# EAGLE board teensy_pedal (EAGLE 7.3.0)
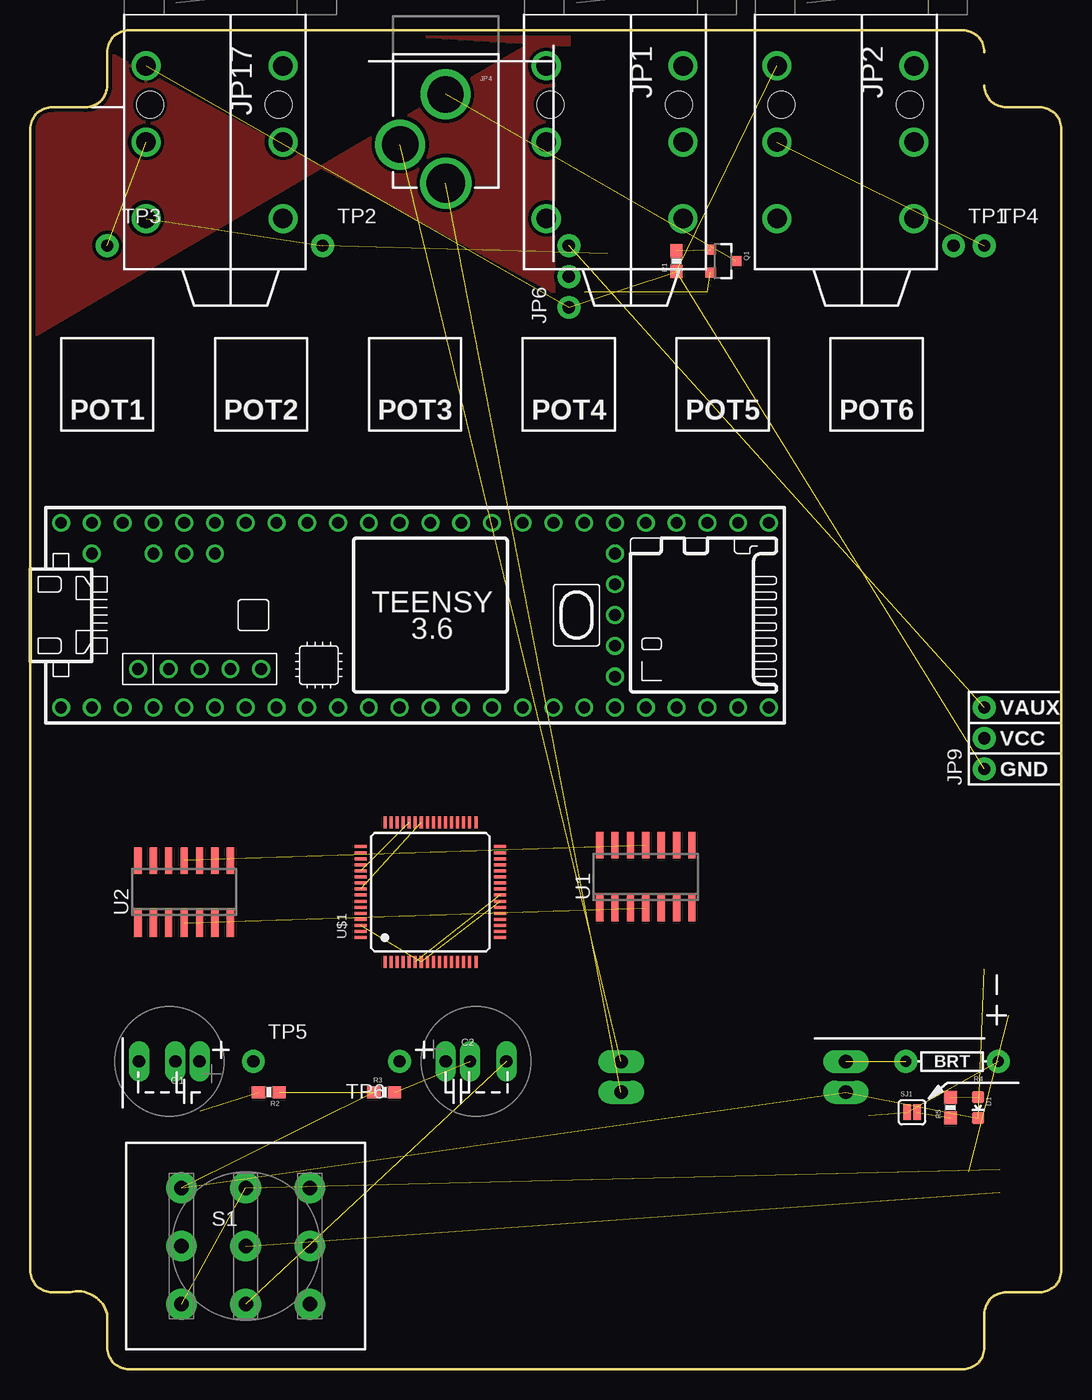
[diagram p0: board, top side]
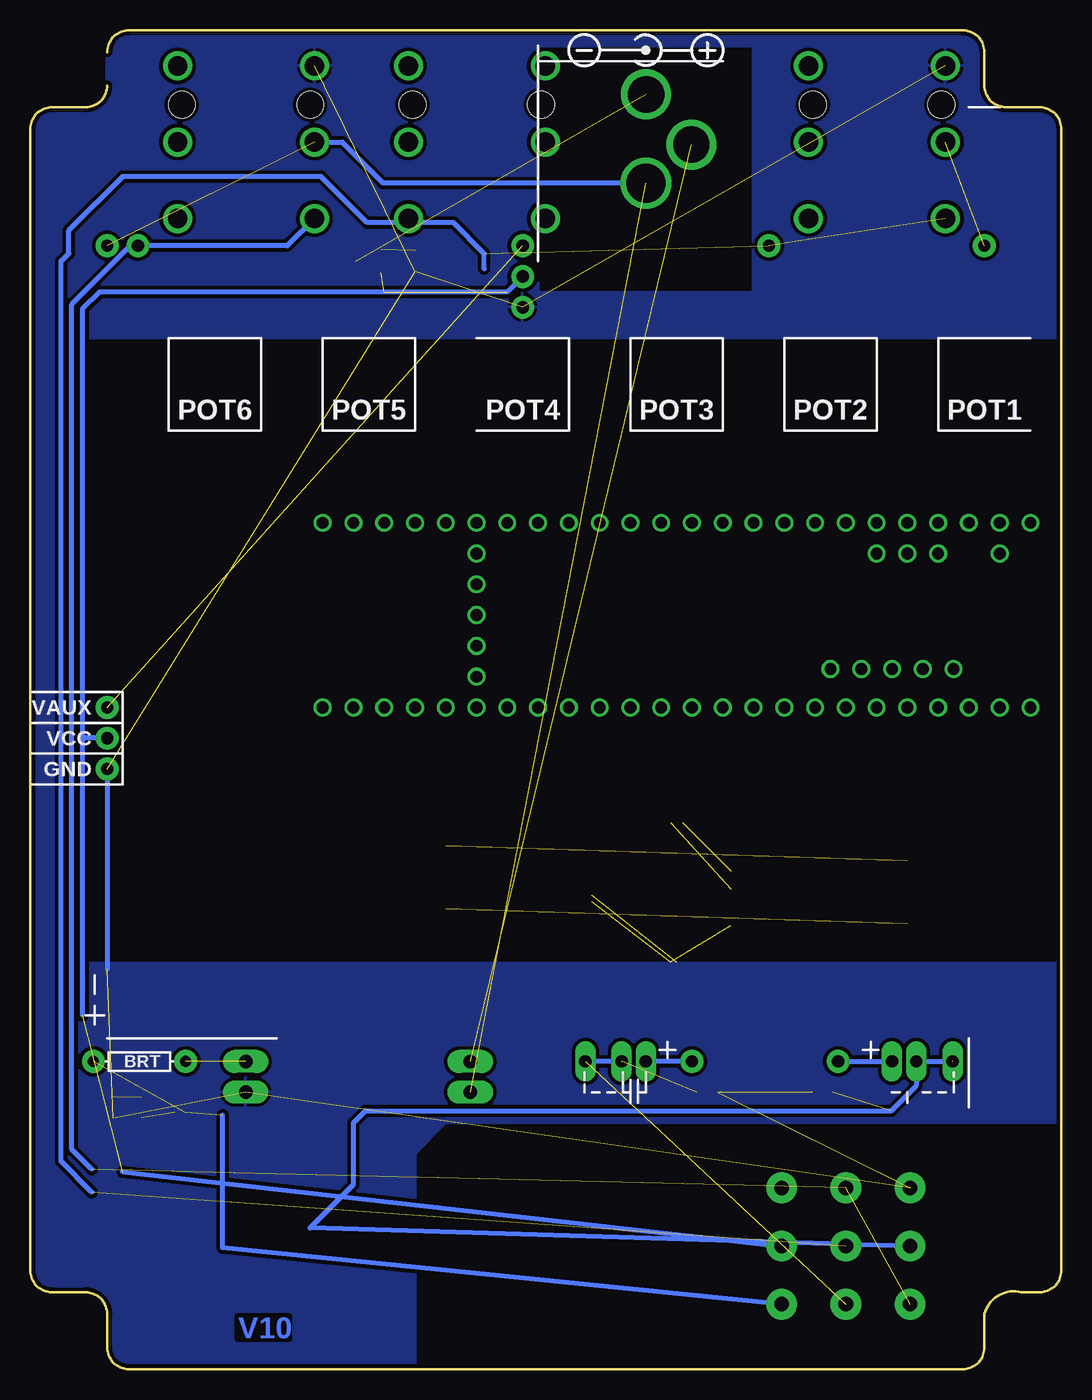
[diagram p1: board, bottom side, seen from below]

Size 85.09 x 110.49 mm. Coordinates in mm from the lower left corner, seen from the top.
Outline: 78.74,108.69 arc90 76.94,110.49 8.15,110.49 arc90 6.35,108.69 6.35,105.94 arc-90 4.55,104.14 1.8,104.14 arc90 0,102.34 0,8.15 arc90 1.8,6.35 3.28,6.35 arc-90 6.35,4.55 6.35,1.8 arc90 8.15,0 76.94,0 arc90 78.74,1.8 78.74,4.55 arc-90 80.54,6.35 83.29,6.35 arc90 85.09,8.15 85.09,102.34 arc90 83.29,104.14 80.54,104.14 arc-90 78.74,105.94
Copper layers (1*16): Top 0.035mm / dielectric 1.5mm / Bottom 0.035mm
Design rules "SparkFun-2-layer-STANDARD": minimum track width 10mil, minimum drill 20mil, track to track 10mil, track to pad 8mil, pad to pad 8mil, via to via 10mil, smd to smd 8mil, copper to edge 8mil, drill to drill 8mil, minimum pad ring 10mil, minimum via ring 10mil, stop-mask expansion 4mil, vias tented up to drill 25mil, thermal gap 10mil

## Footprints (pad centres in the part's own frame; a part is rotated, then mirrored left to right if it is on the bottom)
DUAL-CAP = drill 1.016 pad 1.676 long: P$1 0,0; P$2 2,0; P$3 5,0
LED-0603 = smd 1 x 1: A 0,-0.877; C 0,0.877
AUDIO-JACK-.25-INCH-HORIZ-PTH = drill 1.6: RING 10.5,-6.95; RING-NORM 10.5,4.35; SLEEVE 4.2,-6.95; SLEEVE-NORM 4.2,4.35; TIP 16.8,-6.95; TIP-NORM 16.8,4.35 | hole 2.2: 7.4,4; 7.4,-6.6
1X02_LONGPADS = drill 1.118 pad 1.88 long: 1 0,0; 2 2.54,0
POWER-BARRELJACK-PTH-LOCK-FIXED = drill 2.997 pad 4.115: SLEEVE 0.025,6.557; SLEEVE-NORMAL 3.762,10.7 | drill 3.2 pad 4.115: TIP 0,13.878
1X03_NO_SILK = drill 1.016 pad 1.88: 1 0,0; 2 2.54,0; 3 5.08,0
SOT23-3 = smd 0.8 x 0.9: 1 -0.95,-1; 2 0.95,-1; 3 0,1.1
0603-RES = smd 1.1 x 1: 1 -0.85,0; 2 0.85,0
AXIAL-0.3 = drill 0.9 pad 1.88: P$1 -3.81,0; P$2 3.81,0
STOMP-SWITCH-3PDT = drill 1.2 pad 2.54: P$1 -5.3,4.8; P$2 -5.3,0; P$3 -5.3,-4.8; P$4 0,4.8; P$5 0,0; P$6 0,-4.8; P$7 5.3,4.8; P$8 5.3,0; P$9 5.3,-4.8
PAD-JUMPER-2-NC_BY_PASTE_YES_SILK_FULL_BOX = smd 0.635 x 1.27: 1 -0.412,0; 2 0.412,0
1X01_NO_SILK = drill 1.016 pad 1.88: 1 0,0
SO14 = smd 0.6 x 2.2: 1 -3.81,-2.6; 2 -2.54,-2.6; 3 -1.27,-2.6; 4 0,-2.6; 5 1.27,-2.6; 6 2.54,-2.6; 7 3.81,-2.6; 8 3.81,2.6; 9 2.54,2.6; 10 1.27,2.6; 11 0,2.6; 12 -1.27,2.6; 13 -2.54,2.6; 14 -3.81,2.6
LQFP64 = smd 0.25 x 1: 1 -3.75,-5.75; 2 -3.25,-5.75; 3 -2.75,-5.75; 4 -2.25,-5.75; 5 -1.75,-5.75; 6 -1.25,-5.75; 7 -0.75,-5.75; 8 -0.25,-5.75; 9 0.25,-5.75; 10 0.75,-5.75; 11 1.25,-5.75; 12 1.75,-5.75; 13 2.25,-5.75; 14 2.75,-5.75; 15 3.25,-5.75; 16 3.75,-5.75; 33 3.75,5.75; 34 3.25,5.75; 35 2.75,5.75; 36 2.25,5.75; 37 1.75,5.75; 38 1.25,5.75; 39 0.75,5.75; 40 0.25,5.75; 41 -0.25,5.75; 42 -0.75,5.75; 43 -1.25,5.75; 44 -1.75,5.75; 45 -2.25,5.75; 46 -2.75,5.75; 47 -3.25,5.75; 48 -3.75,5.75 | smd 1 x 0.25: 17 5.75,-3.75; 18 5.75,-3.25; 19 5.75,-2.75; 20 5.75,-2.25; 21 5.75,-1.75; 22 5.75,-1.25; 23 5.75,-0.75; 24 5.75,-0.25; 25 5.75,0.25; 26 5.75,0.75; 27 5.75,1.25; 28 5.75,1.75; 29 5.75,2.25; 30 5.75,2.75; 31 5.75,3.25; 32 5.75,3.75; 49 -5.75,3.75; 50 -5.75,3.25; 51 -5.75,2.75; 52 -5.75,2.25; 53 -5.75,1.75; 54 -5.75,1.25; 55 -5.75,0.75; 56 -5.75,0.25; 57 -5.75,-0.25; 58 -5.75,-0.75; 59 -5.75,-1.25; 60 -5.75,-1.75; 61 -5.75,-2.25; 62 -5.75,-2.75; 63 -5.75,-3.25; 64 -5.75,-3.75
TEENSY_3.5/3.6 = drill 0.965: 0/RX -25.4,-7.62; 1/TX -22.86,-7.62; 2 -20.32,-7.62; 3/CANTX -17.78,-7.62; 3V3 7.62,-7.62; 3V3_2 17.78,-2.54; 3V3_LO -22.86,7.62; 4/CANRX -15.24,-7.62; 5 -12.7,-7.62; 6 -10.16,-7.62; 7 -7.62,-7.62; 8 -5.08,-7.62; 9/CS -2.54,-7.62; 10/CS 0,-7.62; 11/MOSI 2.54,-7.62; 12/MISO 5.08,-7.62; 13/SCK 5.08,7.62; 14/A0 2.54,7.62; 15/A1 0,7.62; 16/A2 -2.54,7.62; 17/A3 -5.08,7.62; 18/A4/SDA -7.62,7.62; 19/A5/SCL -10.16,7.62; 20/A6 -12.7,7.62; 21/A7 -15.24,7.62; 21/DAC0 12.7,7.62; 22/A8 -17.78,7.62; 23/A9 -20.32,7.62; 24 10.16,-7.62; 25 12.7,-7.62; 26 15.24,-7.62; 27 17.78,-7.62; 28 20.32,-7.62; 29 22.86,-7.62; 30 25.4,-7.62; 31/A12 27.94,-7.62; 32/A13 30.48,-7.62; 33/A14 30.48,7.62; 34/A15 27.94,7.62; 35/A16 25.4,7.62; 36/A17 22.86,7.62; 37/A18 20.32,7.62; 38/A19 17.78,7.62; 39/A20 15.24,7.62; A10 -17.78,5.08; A11 -15.24,5.08; A22/DAC1 10.16,7.62; AGND -25.4,7.62; AREF -20.32,5.08; GND -27.94,-7.62; GND2 7.62,7.62; GND3 17.78,0; PROG 17.78,2.54; RESET 17.78,5.08; U5V -21.59,-4.445; UD+ -16.51,-4.445; UD- -19.05,-4.445; UGND1 -13.97,-4.445; UGND2 -11.43,-4.445; VBAT 17.78,-5.08; VIN -27.94,7.62; VUSB -25.4,5.08

## Placement (x,y rotation side)
C1  C in  [DUAL-CAP]  13.97,25.4 180 top
C2  C out  [DUAL-CAP]  34.29,25.4 0 top
D1  RED  [LED-0603]  78.23,21.59 180 top
JP1  OUTPUT JACK 2  [AUDIO-JACK-.25-INCH-HORIZ-PTH]  49.53,111.76 270 top
JP2  INPUT JACK  [AUDIO-JACK-.25-INCH-HORIZ-PTH]  68.58,111.76 270 top
JP3  9VBattery  [1X02_LONGPADS]  48.77,25.4 270 top
JP4  POWER_JACK_TIP_NEGATIVE  [POWER-BARRELJACK-PTH-LOCK-FIXED]  34.29,111.76 180 top
JP6  1x3  [1X03_NO_SILK]  44.45,87.63 90 top
JP9  1x3  [1X03_NO_SILK]  78.74,49.53 90 top
JP14  PTH-LED  [1X02_LONGPADS]  67.31,25.4 270 top
JP17  OUTPUT JACK  [AUDIO-JACK-.25-INCH-HORIZ-PTH]  16.51,111.76 270 top
Q1  2.5A/30V  [SOT23-3]  57.15,91.44 270 top
R1  1M  [0603-RES]  53.34,91.44 90 top
R2  1M  [0603-RES]  19.68,22.86 180 top
R3  1M  [0603-RES]  29.21,22.86 0 top
R4  BRT  [AXIAL-0.3]  76.07,25.4 180 top
R5  1K  [0603-RES]  75.95,21.59 90 top
S1  SWITCH-3PDT  [STOMP-SWITCH-3PDT]  17.78,10.16 0 top
SJ1  disable LED  [PAD-JUMPER-2-NC_BY_PASTE_YES_SILK_FULL_BOX]  72.77,21.21 0 top
TP1  Raw In  [1X01_NO_SILK]  76.2,92.71 0 top
TP2  Raw Out  [1X01_NO_SILK]  24.13,92.71 0 top
TP3  Out Ring  [1X01_NO_SILK]  6.35,92.71 0 top
TP4  In Ring  [1X01_NO_SILK]  78.74,92.71 0 top
TP5  FX Input  [1X01_NO_SILK]  18.41,25.4 0 top
TP6  FX Output  [1X01_NO_SILK]  30.48,25.4 180 top
U1  TL074_SMD  [SO14]  50.8,40.64 0 top
U2  TL074_SMD  [SO14]  12.7,39.37 0 top
U$1  CS42448  [LQFP64]  33.02,39.37 0 top
U$2  TEENSY_3.5/3.6  [TEENSY_3.5/3.6]  30.48,62.23 0 top

## Library data of the parts
C1 C2 = Testing
D1 = SparkFun-LED; PROD_ID: DIO-00819
JP1 JP2 JP17 = SparkFun-Connectors; PROD_ID: CONN-12339; SF_ID: COM-11144
JP3 JP6 JP9 JP14 TP1-TP6 = SparkFun-Connectors
JP4 = Testing; PROD_ID: CONN-08197
Q1 = SparkFun-DiscreteSemi; PROD_ID: TRANS-11308
R1-R3 = SparkFun-Resistors; PROD_ID: RES-07868
R4 = SparkFun-Resistors
R5 = SparkFun-Resistors; PROD_ID: RES-07856
S1 = SparkFun-Electromechanical; PROD_ID: SWCH-13197
SJ1 = SparkFun-Passives
U1 U2 = MusicThingModular
U$1 = akm
U$2 = Teensy356

## Nets
AGND: U$1.42 U$1.56
DGND: U$1.7 U$1.23 U$1.62
FILT+_ADC: U$1.55
FILT+_DAC: U$1.54
FX_IN: C1.P$2 C1.P$3 R2.2 S1.P$2
FX_OUT: C2.P$2 C2.P$3 R3.2 S1.P$6
GND: D1.C JP2.SLEEVE JP6.1 JP9.1 JP14.2 JP17.SLEEVE R1.1 R2.1 R3.1 S1.P$1
LEDA: JP14.1 R4.P$2
N$25: D1.A R5.2
N$35: R4.P$1 S1.P$9 SJ1.1
N$45: JP3.1 JP4.SLEEVE-NORMAL
N$55: JP2.RING JP3.2 JP4.TIP TP4.1
N$65: R5.1 SJ1.2
N$66: JP17.RING TP3.1
N$67: C1.P$1 TP5.1
N$68: C2.P$1 TP6.1
N$70: JP2.TIP S1.P$3 S1.P$4 TP1.1
N$71: JP17.TIP S1.P$5 TP2.1
N$75: Q1.1 R1.2
V+: U1.4 U2.4
V-: U1.11 U2.11
VA: U$1.44 U$1.53
VAUX: JP6.3 JP9.3
VBATT: JP4.SLEEVE Q1.3
VCC: JP6.2 JP9.2 Q1.2 S1.P$8
VD: U$1.6 U$1.24
VLC: U$1.4
VLS: U$1.8
VQ: U$1.43

## Tracks (layer width: path | path; a pad name or v marks a point on that pad's centre or on a via)
AGND  (1 unrouted)
DGND  (2 unrouted)
FX_IN  (2 unrouted)
  Bottom 0.406: S1.P$2 62.01,11.65 58.42,15.24 58.42,20.32 57.4,21.34 14.02,21.34 11.97,23.39 C1.P$2 8.98,25.4
FX_OUT  (3 unrouted)
  Bottom 0.406: 36.27,25.4 C2.P$3
GND  (9 unrouted)
  Bottom 0.406: JP9.1 78.74,33.02
  pour Top (isolate 0.305): 0,85.09 43.18,110.49 43.18,88.9 6.35,108.69 6.35,105.94 arc-90 4.55,104.14 1.8,104.14 arc90 0,102.34
  pour Bottom (isolate 0.305): 0,85.09 85.09,85.09 85.09,102.34 arc90 83.29,104.14 80.54,104.14 arc-90 78.74,105.94 78.74,108.69 arc90 76.94,110.49 43.18,110.49 43.18,88.9 25.4,88.9 25.4,110.49 8.15,110.49 arc90 6.35,108.69 6.35,105.94 arc-90 4.55,104.14 1.8,104.14 arc90 0,102.34
  pour Top (isolate 0.305): 44.45,110.49 44.45,109.22 24.13,110.49
  pour Bottom (isolate 0.305): 24.13,109.22 24.13,110.49 44.45,110.49 44.45,109.22
  pour Bottom (isolate 0.305): 0,33.53 0,20.32 50.8,20.32 53.34,17.78 53.34,0 85.09,0 85.09,33.53
  pour Bottom (isolate 0.305): 85.09,33.02 82.55,33.02 82.55,86.36 85.09,86.36
LEDA  (1 unrouted)
N$25  (1 unrouted)
N$35  (2 unrouted)
  Bottom 0.406: S1.P$9 69.22,10.03 69.22,20.95
N$45  (1 unrouted)
N$55  (2 unrouted)
  Bottom 0.406: JP4.TIP 55.97,97.88 59.35,101.26 JP2.RING
N$65  (1 unrouted)
N$66  (1 unrouted)
N$67
  Bottom 0.406: TP5.1 C1.P$1
N$68
  Bottom 0.406: TP6.1 C2.P$1
N$70  (2 unrouted)
  Bottom 0.406: 80.01,16.51 81.66,18.16 81.66,87.88 76.83,92.71 TP1.1 63.88,92.71 JP2.TIP
N$71  (3 unrouted)
  Bottom 0.406: 80.01,14.61 82.55,17.14 82.55,91.44 81.92,92.08 81.92,93.98 77.47,98.42 61.09,98.42 57.28,94.61 50.16,94.61 47.62,92.08 47.62,90.81
N$75  (1 unrouted)
V+  (1 unrouted)
V-  (1 unrouted)
VA  (1 unrouted)
VAUX  (1 unrouted)
VBATT  (1 unrouted)
VCC  (3 unrouted)
  Bottom 0.406: JP6.2 45.72,88.9 79.38,88.9 80.77,87.5 80.77,52.07 | 77.47,16.29 S1.P$8 | 80.77,29.21 80.77,52.07 | JP9.2 80.77,52.07
VD  (1 unrouted)

## Text on the board
Bottom: V10
tPlace: POT1 | POT2 | POT3 | POT4 | POT5 | POT6 | VAUX | VCC | GND
bPlace: POT1 | POT2 | POT3 | POT4 | POT5 | POT6 | VAUX | VCC | GND | BRT
Measures: Power jack needs minimum 0.25" hole, / possibly larger to allow for plug jacket. | TRS Jacks need / 2x 0.4" holes | LED hole to match component. / 3mm or 5mm are common. | Stomp switch needs / 0.5" hole in chassis | 4x Standoff holes clear 4-40 thread. | All Dimensions in inches / PCB fits inside a 1590BB type case.